# Altium PCB BU04_Kit_PCB.PcbDoc
Units mil, origin at the board's own origin, x right, y up, seen from the top; angles counter-clockwise.
Board outline 2250 x 2505 mil, 2 copper layers (Top Layer, Bottom Layer); 23 components, 40 nets, 137 pads, 56 vias.
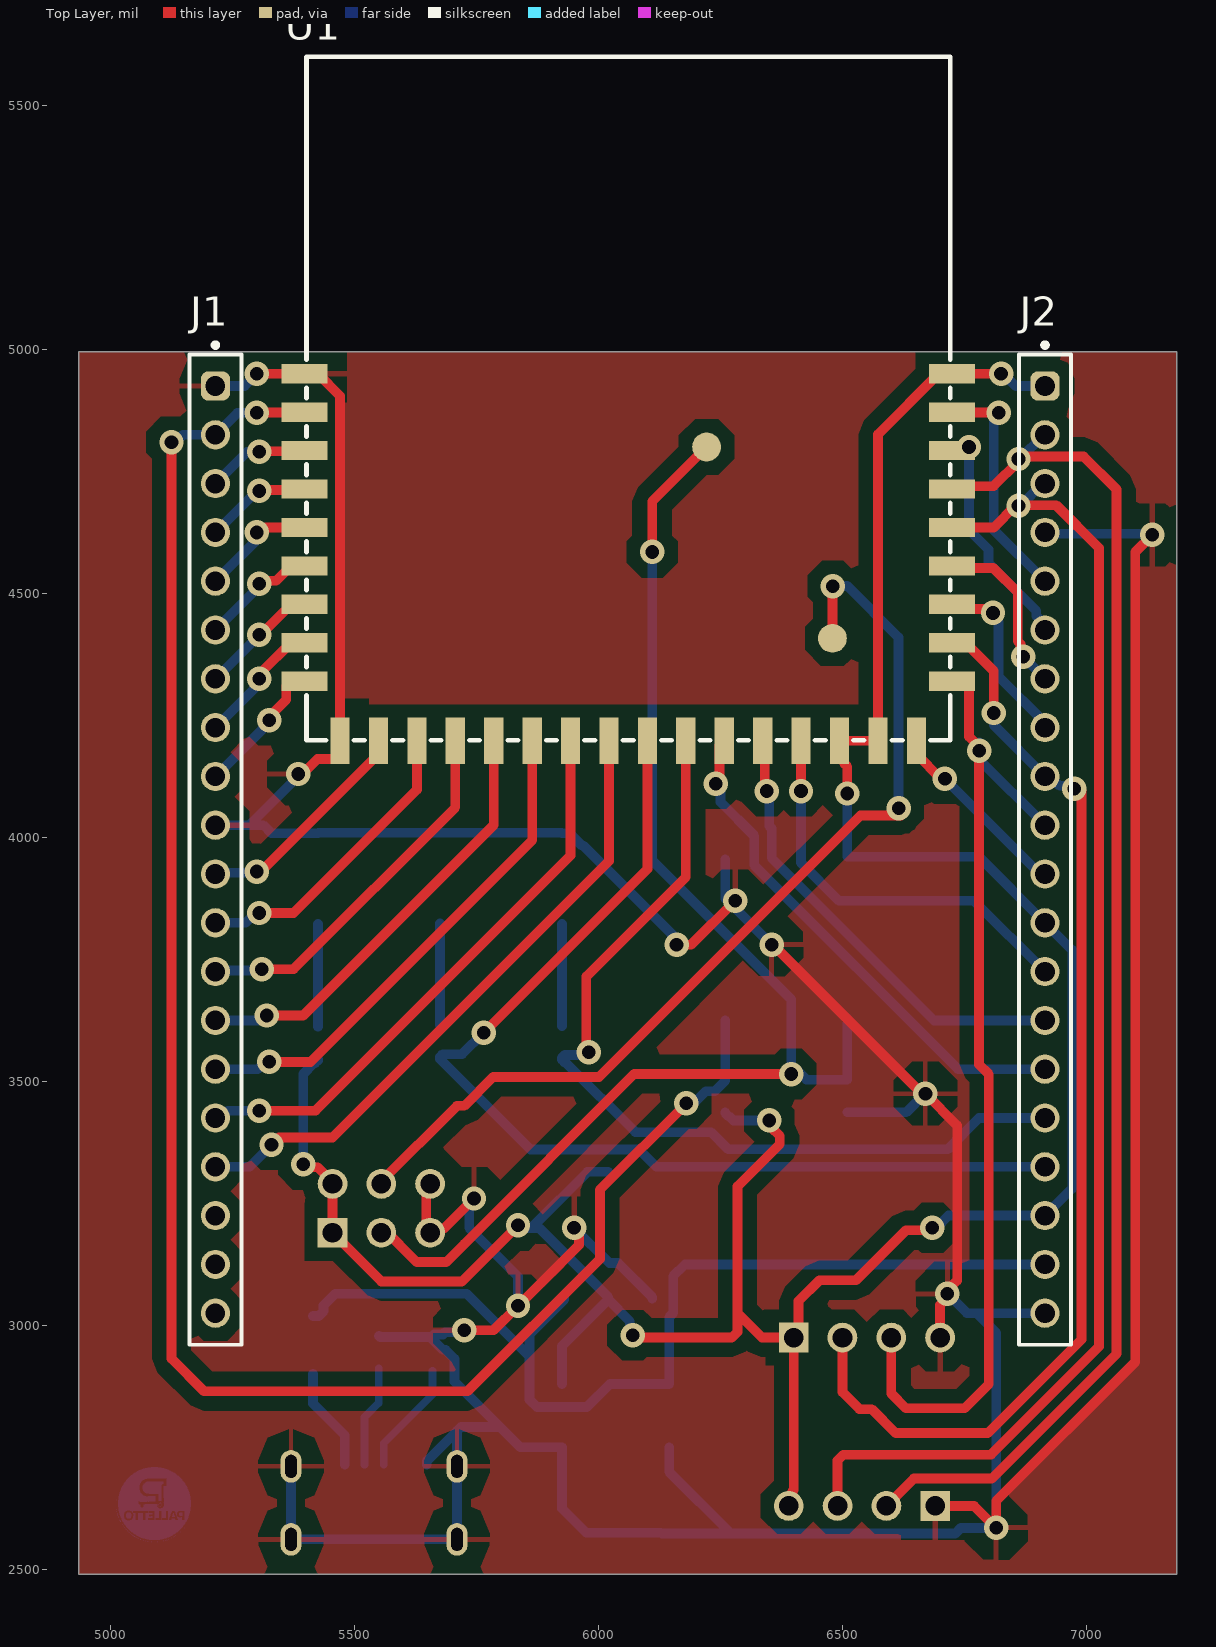
[diagram p0: Top Layer view]
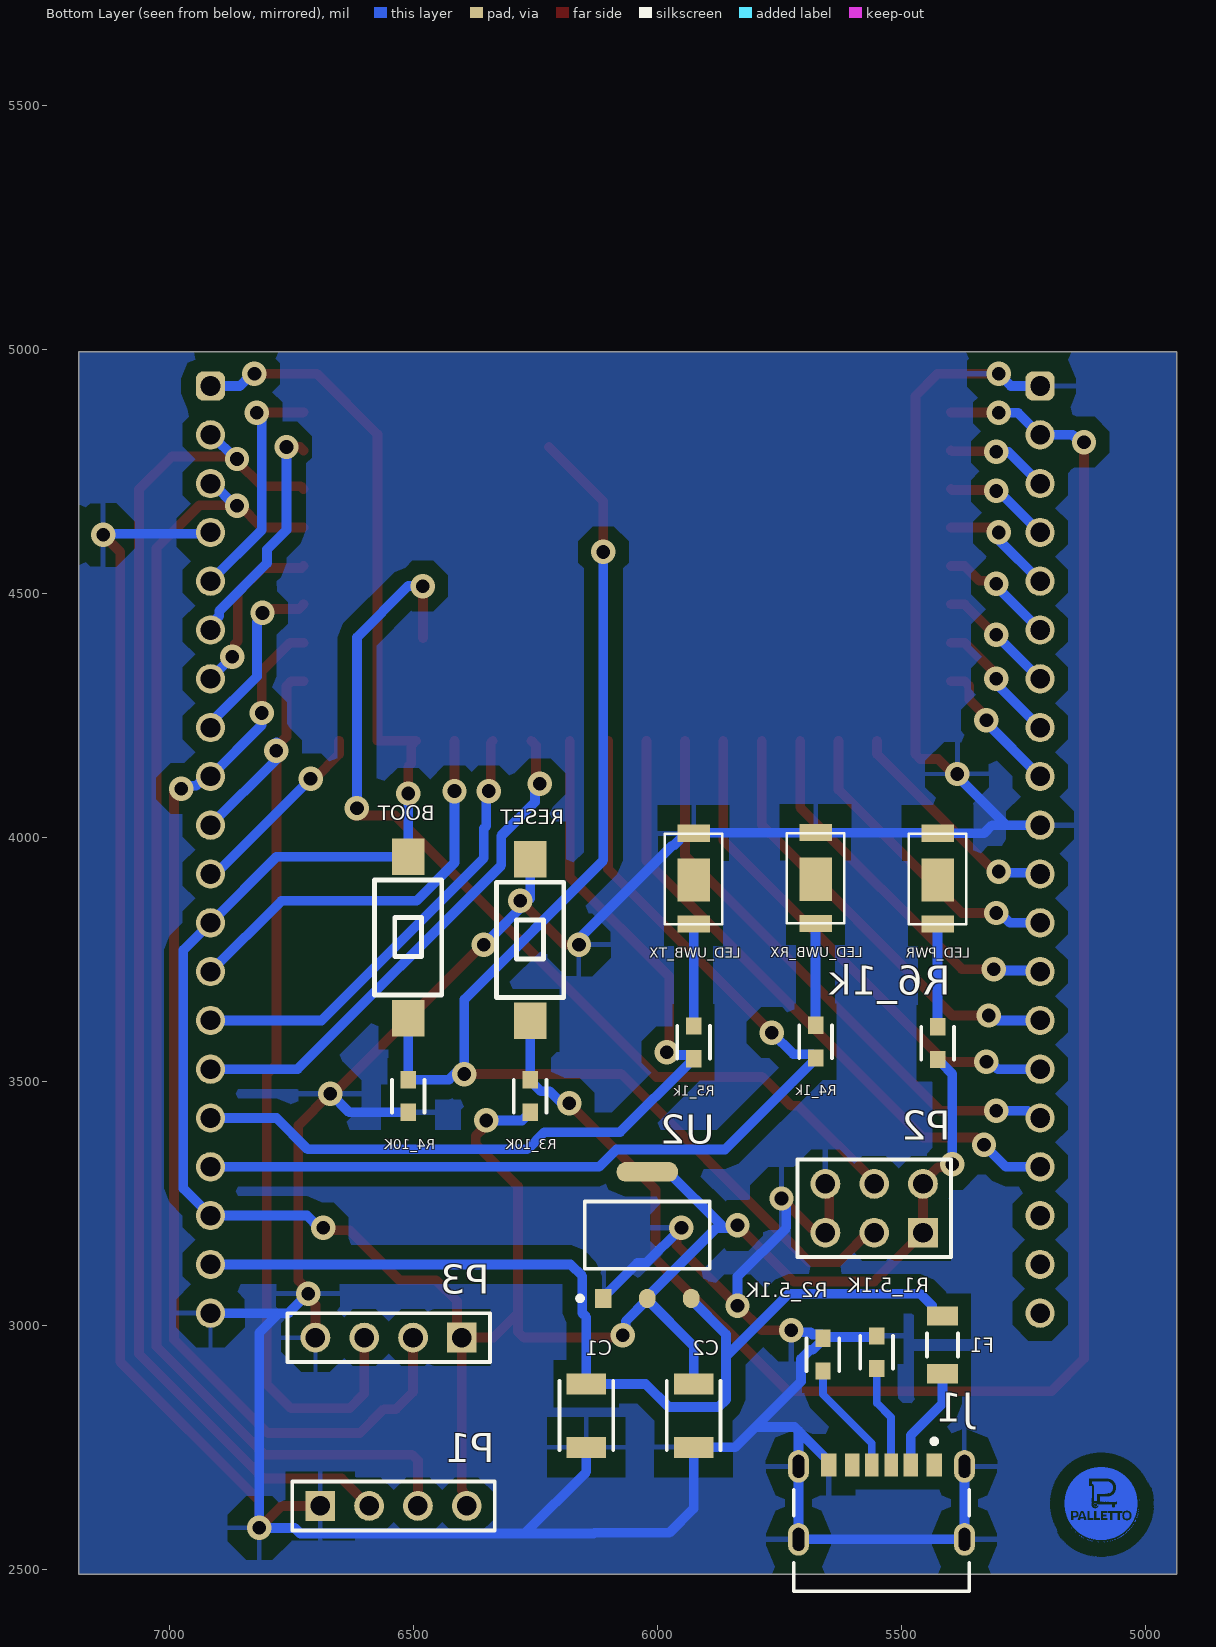
[diagram p1: Bottom Layer view, seen from below]
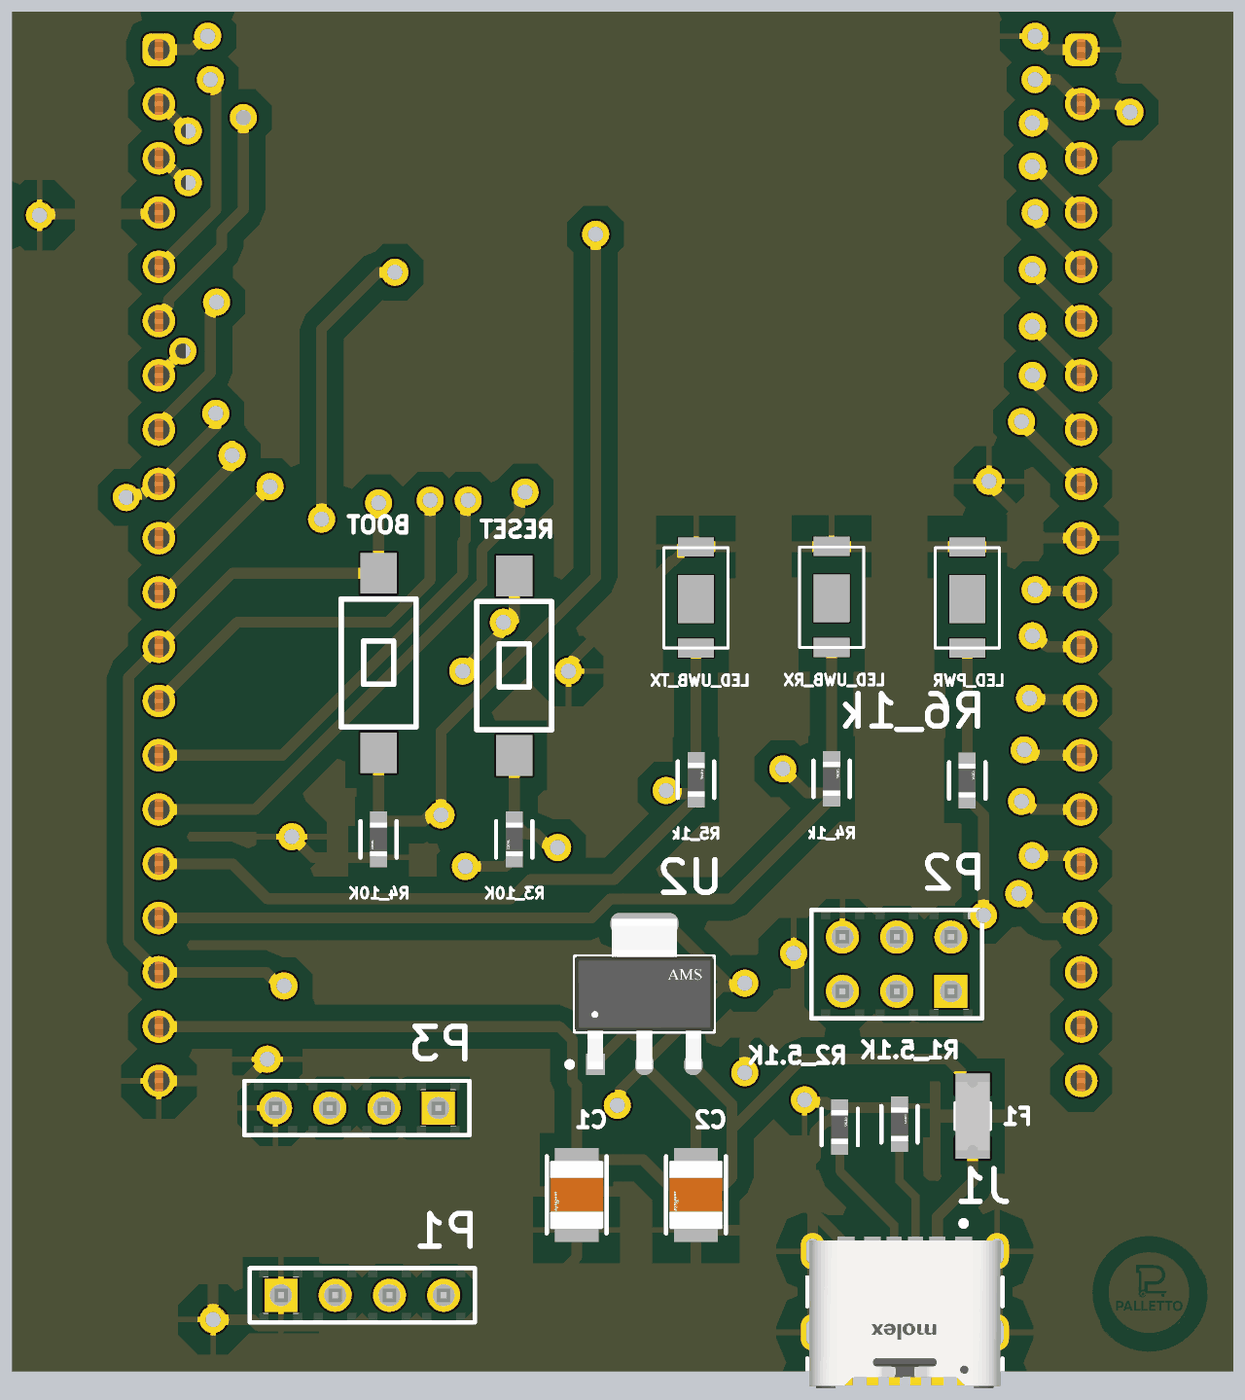
[diagram p2: 3D render of the assembled board from below, using the file's embedded part models]

## Layer stack, top to bottom
Top Solder: solder mask 0.4, Solder Resist, Dk 3.5
Top Layer: signal copper 1.4
Dielectric 1: dielectric 12.6, FR-4, Dk 4.8
Bottom Layer: signal copper 1.4
Bottom Solder: solder mask 0.4, Solder Resist, Dk 3.5

## Board outline
4935,2490 4935,4995 7185,4995 7185,2490

## Design rules (kind name [scope] priority, off if disabled: settings)
Clearance Clearance_Polygon [InPolygon] p1: gap=27.56 ignorepadtopadclearanceinfootprint=TRUE
Clearance Clearance__ [All] p2: gap=15.75 ignorepadtopadclearanceinfootprint=TRUE
MinimumSolderMaskSliver [All] p1: minsoldermaskwidth=0.1
PlaneClearance [All] p1: clearance=100
PlaneConnect [All] p1: planeconnectstyle=Relief reliefexpansion=20 reliefentries=4 reliefconductorwidth=10 reliefairgap=60
PolygonConnect [All] p1: connectstyle=Relief reliefconductorwidth=10 reliefentries=4 polygonreliefangle="90 Angle" airgapwidth=40
RoutingVias [All] p1: holewidth=25 width=60 viastyle="Through Hole" minholewidth=23.62 minwidth=55.12 maxholewidth=50 maxwidth=100
SilkToSilkClearance [All] p1: silktosilkclearance=0.1
SilkToSolderMaskClearance [IsPad] p1: minsilkscreentomaskgap=0 clearancetoexposedcopper=TRUE
SolderMaskExpansion [All] p1: expansion=4 istentingtop=FALSE
UnRoutedNet [All] p1: checkbadconnections=TRUE
Width [All] p1: maxlimit=118.11 minlimit=15.75 preferedwidth=20 minimp=50.000000 maximp=50.000000 favimp=50.000000
24 further rules are at their usual default settings.

## Components (designator, comment, footprint, x,y, rotation, side; value= is the part's Value field where it differs from the comment)
BOOT "SMD TACTILE SWITCH 3X6X2.5MM" SW-SMD_L6.0-W3.5-LS8.0 6510,3795 r90 bottom
C1 "GCJ32ER71E106MA18L" FP-GCJ32E-0_4-0_3-MFG 6145,2815 r270 bottom
C2 "GCJ32ER71E106MA18L" FP-GCJ32E-0_4-0_3-MFG 5925,2815 r270 bottom
F1 "MF-NSMF150-2" BOUR-MF-NSMF150-2_V 5415,2960 r90 bottom
J1 "217175-0001" FP-217175-0001-MFG 5540,2595 r0 bottom
J1 "61302011821" 61302011821 5215,3975 r270 top
J2 "61302011821" 61302011821 6915,3975 r270 top
LED_PWR "5730-LED" 5730-LED 5425,3915 r90 bottom
LED_UWB_RX "5730-LED" 5730-LED 5675,3916.3 r90 bottom
LED_UWB_TX "5730-LED" 5730-LED 5925,3915 r90 bottom
P1 "Debugger" SMTC-MTSW-104-07-X-S-170 6690,2630 r180 bottom
P2 "boot_mode" SMTC-MTSW-103-07-X-D-244 5455,3190 r0 bottom
P3 "UART1" SMTC-MTSW-104-07-X-S-170 6400,2975 r0 bottom
R1_5.1K "AF0603FR-075K1L" FP-AF0603-MFG 5550,2945 r90 bottom
R2_5.1K "AF0603FR-075K1L" FP-AF0603-MFG 5660,2940 r90 bottom
R3_10K "AF0603FR-075K1L" FP-AF0603-MFG 6260,3470 r270 bottom
R4_1k "AF0603FR-075K1L" FP-AF0603-MFG 5675,3581.54 r90 bottom
R4_10K "AF0603FR-075K1L" FP-AF0603-MFG 6510,3470 r270 bottom
R5_1k "AF0603FR-075K1L" FP-AF0603-MFG 5925,3580 r90 bottom
R6_1k "AF0603FR-075K1L" FP-AF0603-MFG 5425,3578.46 r90 bottom
RESET "SMD TACTILE SWITCH 3X6X2.5MM" SW-SMD_L6.0-W3.5-LS8.0 6260,3790 r90 bottom
U1 "BU04" WIRELM-SMD_BU04 6060.95,4574.13 r0 top
U2 "AMS1117-3.3" FP-AMS1117-IPC_C 6020,3185 r90 bottom

## Footprints (in the part's own frame and the unit in brackets; to place one, negate y for a bottom-side part, rotate by r counter-clockwise, add the part's x,y. Pads: shape width x height; smd on the part's side, far side on the other; paste and mask are expansions set on the pad)
5730-LED [mm]
  rect 0.9x1.7 smd paste+0 mask+0.051: A(-2.35,0) C(2.38,0)
  rect 2.25x1.7 smd paste+0 mask+0.051: P$2(-0.055,0)
  silkscreen extent -2.35,-1.5 2.35,1.5
61302011821 [mm] "Socket Header, Pitch 2.54 mm, THT, Vertical, single row, 20p"
  rrect50% 1.52x1.52 hole 1.02: 1(-24.13,0)
  round 1.52 hole 1.02: 2(-21.59,0) 3(-19.05,0) 4(-16.51,0) 5(-13.97,0) 6(-11.43,0) 7(-8.89,0) 8(-6.35,0) 9(-3.81,0) 10(-1.27,0) 11(1.27,0) 12(3.81,0) 13(6.35,0) 14(8.89,0) 15(11.43,0) 16(13.97,0) 17(16.51,0) 18(19.05,0) 19(21.59,0) 20(24.13,0)
  silkscreen extent -26.38,-1.35 25.78,1.35, body extent -25.65,-1.25 25.65,1.25, height 8.55
BOUR-MF-NSMF150-2_V [mm] "SMD, 2-Leads, Body 3.2x1.6mm"
  rect 1x1.6 smd: 1(-1.5,0) 2(1.5,0)
  silkscreen extent -0.6,-0.8 0.6,0.8, body extent -1.6,-0.8 1.6,0.8, height 0.55
FP-217175-0001-MFG [mm]
  rrect100% 1.1x1.7 hole 1.2 slot 0.6 at 0 deg paste-2539.97 mask+0: 1(-4.32,-2.95) 2(4.32,-2.95) 3(-4.32,0.85) 4(4.32,0.85)
  rect 0.7x1.2 smd paste+0 mask+0: A5(-0.5,-3.03) B5(0.5,-3.03)
  rect 0.76x1.2 smd paste+0 mask+0: A9(1.52,-3.03) B9(-1.52,-3.03)
  rect 0.8x1.2 smd paste+0 mask+0: A12(2.75,-3.03) B12(-2.75,-3.03)
  silkscreen extent -4.57,-4.37 4.57,3.55, body extent -4.47,-3.45 4.47,3.45, height 3.46
FP-AF0603-MFG [mm]
  rect 0.9x0.8 smd paste+0 mask+0: 1(-0.85,0) 2(0.85,0)
  silkscreen extent -0.85,-0.85 0.85,0.85, body extent -0.8,-0.4 0.8,0.4, height 0.55
FP-AMS1117-IPC_C [mm]
  rect 1.004x0.872 smd paste+0 mask+0: 1(-3.295,2.29)
  rrect100% 1.004x0.872 smd paste+0 mask+0: 2(-3.295,0) 3(-3.295,-2.29)
  rrect87% 1.004x3.182 smd paste+0 mask+0: 4(3.295,0)
  silkscreen extent -3.42,-3.25 1.75,3.63, body extent -3.53,-3.25 3.53,3.25, height 1.8
FP-GCJ32E-0_4-0_3-MFG [mm]
  rect 1.1x2.05 smd paste+0 mask+0: 1(-1.65,0) 2(1.65,0)
  silkscreen extent -1.8,-1.4 1.8,1.4, body extent -1.6,-1.25 1.6,1.25, height 2.8
SMTC-MTSW-103-07-X-D-244 [mm] "Assembly .025\" [.64] SQ Post Terminal Strip, 2x3 Pins, Vertical, 2.54mm Pitch, Male"
  rect 1.55x1.55 hole 1.02: 1(0,0)
  round 1.55 hole 1.02: 2(0,-2.54) 3(2.54,0) 4(2.54,-2.54) 5(5.08,0) 6(5.08,-2.54)
  silkscreen extent -1.46,-3.81 6.54,1.27, body extent -1.27,-3.81 6.35,1.27, height 2.18
SMTC-MTSW-104-07-X-S-170 [mm] "Assembly .025\" [.64] SQ Post Terminal Strip, 1x4 Pins, Vertical, 2.54mm Pitch, Male"
  rect 1.55x1.55 hole 1.02: 1(0,0)
  round 1.55 hole 1.02: 2(2.54,0) 3(5.08,0) 4(7.62,0)
  silkscreen extent -1.46,-1.27 9.08,1.27, body extent -1.27,-1.27 8.89,1.27, height 4.06
SW-SMD_L6.0-W3.5-LS8.0 [mm]
  rect 1.9x1.7 smd paste+0 mask+0.102: 1(-4.2,0) 2(4.2,0)
  silkscreen extent -3,-1.75 3,1.75
WIRELM-SMD_BU04 [mm]
  rect 2.4x1 smd paste+0 mask+0.051: 1(-16.85,9.55) 2(-16.85,7.55) 3(-16.85,5.55) 4(-16.85,3.55) 5(-16.85,1.55) 6(-16.85,-0.45) 7(-16.85,-2.45) 8(-16.85,-4.45) 9(-16.85,-6.45) 26(16.85,-6.45) 27(16.85,-4.45) 28(16.85,-2.45) 29(16.85,-0.45) 30(16.85,1.55) 31(16.85,3.55) 32(16.85,5.55) 33(16.85,7.55) 34(16.85,9.55)
  rect 1x2.4 smd paste+0 mask+0.051: 10(-15,-9.55) 11(-13,-9.55) 12(-11,-9.55) 13(-9,-9.55) 14(-7,-9.55) 15(-5,-9.55) 16(-3,-9.55) 17(-1,-9.55) 18(1,-9.55) 19(3,-9.55) 20(5,-9.55) 21(7,-9.55) 22(9,-9.55) 23(11,-9.55) 24(13,-9.55) 25(15,-9.55)
  round 1.5 smd paste+0 mask+0.051: 35(4.08,5.74) 36(10.63,-4.22)
  silkscreen extent -16.75,-9.52 16.76,26.05

## Part data
BOOT RESET: Manufacturer=USAKRO, Manufacturer Part=UK-B0240-R-250, Contributor=LCSC, spicePre=S, spiceSymbolName="SMD TACTILE SWITCH 3X6X2.5MM", Supplier=LCSC, Supplier Part=C556660
C1 C2: library part CMP-06035-029490-1, "Capacitor 10uF ±20%, X7R, 25VDC, SMD 1210 (3225 metric)"
F1: library part CMP-2000-06693-1, "PTC Resettable Fuse, 6 V, 100 A, -40 to 85 degC, 2-Pin SMD, RoHS, Tape and Reel", Current Rating=100A, Hold Current=1.5A, Manufacturer=Bourns, Maximum Voltage=6VDC, Maximum Voltage DC=6V, Operating Temperature Range=-40Cto+85C, Package / Case=1206(3216metric), Package Description="2-Pin Surface Mount Device, Body 3.2 x 1.6 mm", Resistance=130mOhms, Trip Current=3A, Brand=Bourns, Current Rating (Max)=100A, Current Rating - Max=100A, Datasheet URL=http://www.bourns.com/docs/Product-Datasheets/mfnsmf.pdf, Datasheet Version="Rev. T, 08/2015", Dimensions=3.4mmLx1.8mmWx0.7mmH, Factory Pack Quantity=3000, Manufacturer URL=http://www.bourns.com/, Mounting Style=SMD/SMT, Mounting Technology=SurfaceMount, Package Reference=MF-NSMF150-2, Packaging=Reel, Product Category=ResettableFuses-PPTC, RoHS=Details, Series=MF-NSMF, Termination Style=SMD/SMT, Tradename=Multifuse, Type=PTCResettableFuses
J1: library part CMP-04767-000026-1, "CONN RCP USB2.0 C 6+18P SMD RA"
J1 J2: library part CMP-1502-01348-4, "THT Vertical Socket Header WR-PHD, Pitch 2.54 mm, Single Row, 20 pins", Contact Resistance=20mΩ, Current Rating=3A, Operating Supply Voltage=250V, Gender=Female, Lead Pitch=2.54mm, Number of Pins=20, Orientation=Vertical
P1 P3: library part CMP-1024-00104-1, "Modified .025\" SQ Post Header, Through-hole, Vertical, -55 to 125 degC, 2.54 mm Pitch, 4-Pin, Male, RoHS", Manufacturer=Samtec, PartNumber=MTSW-104-07-G-S-170, Temperature Range="-55 to 125 degC", ComponentLink1Description="Manufacturer URL", ComponentLink1URL=http://www.samtec.com, ComponentLink2Description=Datasheet, ComponentLink2URL=http://www.samtec.com/documents/webfiles/pdf/MTSW.PDF, ComponentLink3Description="Package Specification", ComponentLink3URL=http://www.samtec.com/documents/webfiles/cpdf/MTSW-XXX-XX-X-X-XXXX-XX-XXX-MKT1.pdf, DatasheetVersion=F-214, Mounting Technology=Through-hole, Orientation=Vertical, PackageDescription="Assembly .025\" [.64] SQ Post Terminal Strip", PackageReference=MTSW-104-07-X-S-170, PackageVersion="BI, 2/1987", Pitch="2.54 mm", RoHS=True
P2: library part CMP-1024-00096-1, "Modified .025\" SQ Post Header, Through-hole, Vertical, -55 to 125 degC, 2.54 mm Pitch, 6-Pin, Male, RoHS", Manufacturer=Samtec, PartNumber=MTSW-103-07-G-D-244, Temperature Range="-55 to 125 degC", ComponentLink1Description="Manufacturer URL", ComponentLink1URL=http://www.samtec.com, ComponentLink2Description=Datasheet, ComponentLink2URL=http://www.samtec.com/documents/webfiles/pdf/MTSW.PDF, ComponentLink3Description="Package Specification", ComponentLink3URL=http://www.samtec.com/documents/webfiles/cpdf/MTSW-XXX-XX-X-X-XXXX-XX-XXX-MKT1.pdf, DatasheetVersion=F-214, Mounting Technology=Through-hole, Orientation=Vertical, PackageDescription="Assembly .025\" [.64] SQ Post Terminal Strip", PackageReference=MTSW-103-07-X-D-244, PackageVersion="BI, 2/1987", Pitch="2.54 mm", RoHS=True
R1_5.1K R2_5.1K: library part CMP-03412-041991-1, "Anti-Sulfurated Chip Resistors Automotive Grade 5.1kΩ 1% 100ppm/°C 0603", Case/Package=0603, Max Operating Temperature=155°C, Max Power Dissipation=100mW, Min Operating Temperature=-55°C, Resistance=5.1kR, Resistor Type="Thick Film", Temperature Coefficient=100ppm/°C, Tolerance=1%, Features="Moisture Resistant", Height=0.022inch, Length=0.063inch, Number of Terminations=2, Packaging="Tape and Reel", RoHS Compliant=Yes, Series=AF, Width=0.031inch
R3_10K R4_10K: library part CMP-03412-041991-1, "Anti-Sulfurated Chip Resistors Automotive Grade 5.1kΩ 1% 100ppm/°C 0603", Case/Package=0603, Max Operating Temperature=155°C, Max Power Dissipation=100mW, Min Operating Temperature=-55°C, Resistance=10kR, Resistor Type="Thick Film", Temperature Coefficient=100ppm/°C, Tolerance=1%, Features="Moisture Resistant", Height=0.022inch, Length=0.063inch, Number of Terminations=2, Packaging="Tape and Reel", RoHS Compliant=Yes, Series=AF, Width=0.031inch
R4_1k R5_1k R6_1k: library part CMP-03412-041991-1, "Anti-Sulfurated Chip Resistors Automotive Grade 5.1kΩ 1% 100ppm/°C 0603", Case/Package=0603, Max Operating Temperature=155°C, Max Power Dissipation=100mW, Min Operating Temperature=-55°C, Resistance=1kR, Resistor Type="Thick Film", Temperature Coefficient=100ppm/°C, Tolerance=1%, Features="Moisture Resistant", Height=0.022inch, Length=0.063inch, Number of Terminations=2, Packaging="Tape and Reel", RoHS Compliant=Yes, Series=AF, Width=0.031inch
U1: JLCPCB Part Class="Extended Part", Manufacturer=Ai-Thinker(安信可), Contributor=lcsc, Manufacturer Part=BU04, spicePre=U, spiceSymbolName=BU04, Supplier=LCSC, Supplier Part=C42420050
U2: library part CMP-209535-000001-1, "LDO Voltage Regulators 1A, 3.3V", Dropout Voltage=1.1V, Manufacturer="Advanced Monolithic Systems", Max Junction Temp=+125°C, Max Power Dissipation=1.2W, Max Supply Voltage=15V, Nominal Supply Current=5mA, Output Current=1A, Output Voltage=3.3V, Package=AMS1117, Temperature="-40°C to +125°C", Temperature Range Low=-40°C, Automotive=No, Category=IC, ComponentLink2Description=Datasheet, ComponentLink2URL=http://www.advanced-monolithic.com/pdf/ds1117.pdf, Device Class L1="Integrated Circuits (ICs)", Device Class L2="Power Management ICs", Device Class L3="Voltage Regulators - Linear", Height=1.8mm, Ipc Land Pattern Name=SOT229P700X180-4, Lead Free=Yes, Manufacturer Part Number=AMS1117-3.3, Number Of Outputs=1, Octopart=https://octopart.com/ams1117-3.3-advanced+monolithic+systems-25899300, Output Type=Fixed, RoHS=TRUE, Standoff Height=0.64mm, Temperature Range High=+125°C
LED_PWR LED_UWB_RX LED_UWB_TX: Contributor=wystewart, spicePre=?, spiceSymbolName=5730-LED

## Via types
v1: diameter 50, hole 28, Top Layer to Bottom Layer, 56 vias

## Nets (pads, with @x,y where several pads share a name; then routed paths per layer and width w, separated by ;. In a path a pad name is that pad's centre, name@x,y a point inside that pad or via, vN(x,y) a via of type N, cw(c..) or ccw(c..) an arc to the next point about the centre after c; other vN are vias at no path point)
NetBOOT_1: BOOT.1 P2.3 R4_10K.1 U1.35 | length 2712
  Top Layer w20: P2.3@5560,3197.5 5627.5,3130 5688.28,3130 5725,3166.72 5725,3166.77 6073.23,3515 v1(6395,3515) ; v1(6110,4585) 6110,4688.54 U1.35
  Bottom Layer w20: v1(6110,4585) 6110,3953.23 6395,3668.23 v1(6395,3515) ; v1@6405,3525 6426.54,3503.46 R4_10K.1 BOOT.1
NetBOOT_2: BOOT.2 C2.1 J2.1 J2.12 J2.18 P1.4 P2.1 P2.2 P3.1 R3_10K.2 R6_1k.1 U1.23 U1.24 U1.34 U2.2 U2.4 | length 6011.1
  Top Layer w20: v1(5395,3330) 5400.74,3324.26 5424.64,3324.26 5448.08,3300.81 5443.9,3301.1 P2.2 5455,3200 P2.1 5555,3090 5680.12,3090 5720,3090 v1(5835,3205) ; v1(6070,2980) 6075,2975 6273.28,2975 6285,2986.72 6285,3025 ; v1@6355,3405 6371.72,3388.28 6371.72,3371.72 6285,3285 6285,3025 ; P1.4 6397.85,2637.85 6397.85,2660.08 6400,2662.23 P3.1 ; v1(6510,4090) 6510,4145 6503.7,4151.3 6503.7,4188.47 U1.23 U1.24 6572.76,4826.1 6696.77,4950.12 U1.34 6724.39,4950.06 6824.94,4950.06 v1(6825,4950) ; v1(6684.25,3200) 6679.25,3195 6630,3195 6527.5,3092.5 6452.5,3092.5 6410,3050 6410,2985 P3.1 ; 6285,3025 6335,2975 P3.1
  Bottom Layer w20: v1(5395,3330) 5395,3515 5417.28,3537.28 5419.25,3537.28 5425,3543.03 R6_1k.1 ; v1@5840.74,3199.26 5878.62,3199.26 6020,3057.88 U2.2 U2.2@6020,3052.67 ; 5867.4,3205 5977.13,3314.72 U2.4 ; C2.1 5925,2957.67 U2.2@6020,3052.67 ; v1(6070,2980) 6064.26,2985.74 6064.26,3008.41 U2.2@6020,3052.67 ; R3_10K.2 6260,3434.57 6265.75,3428.82 6267.72,3428.82 6276.54,3420 v1(6350,3420) ; P3.1@6390,2965 P3.1 ; v1@6510,4085 BOOT.2 6779.65,3960.35 J2.12 6970.67,3769.33 6970.67,3280.67 J2.18 6717.37,3225 6692.37,3200 v1(6684.25,3200) ; v1@6835,4945 6855,4925 J2.1
NetC1_1: C1.1 F1.2 J2.19 U2.3 | length 2068.4
  Bottom Layer w20: F1.2 5426.81,3019.06 5436.49,3028.74 5436.49,3040.55 5460.94,3065 5730,3065 5858.9,2936.1 ; U2.3 5929.84,3052.67 5858.9,2981.73 5858.9,2936.1 ; J2.19 6177.28,3125 6153.07,3100.79 6153.07,3024.84 6145,3016.77 C1.1 6023.42,2879.96 5976.02,2832.56 5873.98,2832.56 5858.9,2847.64 5858.9,2936.1
NetC1_2: C1.2 C2.2 J1.1 J1.2@5710.08,2711.14 J1.3@5369.92,2561.54 J1.4@5710.08,2561.54 J1.10 J1.A12 J2.4 J2.20 LED_PWR.C LED_UWB_RX.C LED_UWB_TX.C P1.1 P2.5 P2.6 P3.4 R1_5.1K.2 R2_5.1K.2 R4_10K.2 RESET.2 U1.1 U1.10 U2.1 | length 10833.3
  Top Layer w20: v1(5300,4950) 5300.06,4950.06 5397.5,4950.06 U1.1 5425.12,4950.12 5470.55,4904.69 5470.55,4198.31 U1.10 5470.4,4170.59 5460.71,4160.91 5424.02,4160.91 5393.12,4130 v1(5385,4130) ; P2.6 5647.15,3282.15 5647.15,3197.85 P2.5 5662.85,3197.85 5682.85,3197.85 v1(5745,3260) ; v1(5725,2990) 5785,2990 v1(5835,3040) 5960,3165 v1@5960,3190 ; v1(6160,3780) 6190,3780 v1(6280,3870) ; v1(6355,3780) 6357.5,3780 6662.5,3475 v1(6670,3475) 6735,3410 6735,3091.72 v1@6721.44,3078.16 ; P1.1 6770,2630 v1(6815,2585) 6815,2640 7100,2925 7100,4585 v1(7135,4620) ; P3.4 6700,3041.88 6715,3056.88 v1(6715,3065)
  Bottom Layer w20: J1.10 5285,4025 ; J1.1@5215,4925 5275,4925 v1(5300,4950) ; J1.1@5369.92,2711.14 5369.92,2561.54 5710.08,2561.54 5710.08,2711.14 5710.08,2783.98 ; v1@5387.5,4127.5 5285,4025 ; R1_5.1K.2 5552.5,2975.96 R2_5.1K.2@5657.5,2975.96 ; J1.A12 5648.27,2722.17 5710.08,2783.98 ; v1(5725,2990) 5720.75,2985.75 5685.75,2985.75 5681.18,2981.18 5662.72,2981.18 R2_5.1K.2@5657.5,2975.96 ; v1(5745,3260) 5735,3250 5735,3200 5835,3100 v1(5835,3040) ; v1(5950,3200) 6022.38,3127.62 6040.41,3127.62 6110.16,3057.88 U2.1 ; C1.2 6145,2700 6271.26,2573.74 ; v1@6154.26,3797.74 5969.13,3982.87 5966.58,3982.87 5940.75,4008.7 LED_UWB_TX.C 5924.35,4009.35 5675.65,4009.35 LED_UWB_RX.C 5674.35,4009.35 5425.65,4009.35 LED_PWR.C 5329.48,4008.7 5313.18,4025 5285,4025 ; RESET.2 6260,3875 v1(6355,3780) ; R4_10K.2 6630.68,3436.54 6669.15,3475 v1(6670,3475) ; P1.1@6671.09,2611.09 P1.1 ; v1(6715,3065) 6755,3025 6775,3025 ; J2.20 6775,3025 ; J2.4 6917.5,4622.5 7132.5,4622.5 v1(7135,4620) ; R2_5.1K.2@5657.5,2975.96 R2_5.1K.2 5660,2971.5 5681.5,2950 5686.41,2950 5705,2931.41 5705,2885 5798.05,2791.95 ; 5710.08,2783.98 5718.05,2791.95 5798.05,2791.95 ; 5798.05,2791.95 5839.96,2750.04 C2.2 5925,2625 5975,2575 6128.74,2575 6130,2573.74 6271.26,2573.74 ; 6271.26,2573.74 6731.18,2573.74 6742.44,2585 v1(6815,2585) 6815,2985 6775,3025
NetF1_1: F1.1 J1.B9 | length 213.6
  Bottom Layer w20: F1.1 5415,2839.68 5480.16,2774.53 J1.B9
NetJ1_2: J1.2@5215,4825 R3_10K.1 RESET.1 U1.2 | length 3796.7
  Top Layer w20: v1(5125,4810) 5125,2931.72 5191.72,2865 5731.77,2865 6003.01,3136.25 6003.01,3278.01 v1(6180,3455) ; v1(5300,4870) 5300.69,4870.69 5396.87,4870.69 U1.2
  Bottom Layer w20: v1(5125,4810) 5133.12,4810 5148.12,4825 5215,4825 5260,4870 v1(5300,4870) v1@5310,4870 ; v1@6200,3460 6220,3480 6238.5,3480 6260,3501.5 R3_10K.1 RESET.1
NetJ1_3: J1.3@5215,4725 U1.3 | length 200.6
  Top Layer w20: v1(5305,4790) 5306.32,4791.32 5396.24,4791.32 U1.3
  Bottom Layer w20: J1.3@5215,4725 5280,4790 v1@5295,4790
NetJ1_4: J1.4@5215,4625 U1.4 | length 212.3
  Top Layer w20: v1(5305,4710) 5306.95,4711.95 5395.61,4711.95 U1.4
  Bottom Layer w20: J1.4@5215,4625 5295,4705 v1@5300,4705
NetJ1_5: J1.5 U1.5 | length 237
  Top Layer w20: v1(5300,4625) 5308.12,4625 5318.28,4635.16 U1.5
  Bottom Layer w20: J1.5 5300,4610 v1(5300,4625)
NetJ1_6: J1.6 U1.6 | length 239.9
  Top Layer w20: v1(5305,4520) 5310.74,4525.74 5339.32,4525.74 5370,4556.42 U1.6
  Bottom Layer w20: J1.6 5305,4515 v1(5305,4520)
NetJ1_7: J1.7 U1.7 | length 245.8
  Top Layer w20: v1(5305,4415) 5307.32,4415 5370,4477.68 U1.7
  Bottom Layer w20: J1.7 v1(5305,4415)
NetJ1_8: J1.8 U1.8 | length 275.7
  Top Layer w20: v1(5305,4325) 5310.74,4330.74 5310.74,4339.68 5370,4398.94 U1.8
  Bottom Layer w20: J1.8 5305,4315 v1(5305,4325) v1@5305,4335
NetJ1_9: J1.9 U1.9 | length 292
  Top Layer w20: v1(5325,4240) 5325,4247.15 5360.32,4282.47 5360.32,4310.51 5370,4320.2 U1.9
  Bottom Layer w20: J1.9 5325,4235 v1(5325,4240) v1@5325,4245
NetJ1_11: J1.11 U1.11 | length 463.4
  Top Layer w20: v1(5300,3930) 5308.54,3930 5549.14,4170.59 U1.11
  Bottom Layer w20: J1.11 5217.5,3927.5 5297.5,3927.5 v1(5300,3930)
NetJ1_12: J1.12 U1.12 | length 626.2
  Top Layer w20: v1(5305,3845) 5375,3845 5627.88,4097.88 U1.12
  Bottom Layer w20: J1.12 5276.88,3825 5296.88,3845 v1(5305,3845)
NetJ1_13: J1.13 U1.13 | length 767.6
  Top Layer w20: v1(5310,3730) 5375,3730 5706.62,4061.62 U1.13
  Bottom Layer w20: J1.13 5217.5,3727.5 5307.5,3727.5 v1(5310,3730)
NetJ1_14: J1.14 U1.14 | length 909
  Top Layer w20: v1(5320,3635) 5395,3635 5785.36,4025.36 U1.14
  Bottom Layer w20: J1.14 5301.88,3625 5311.88,3635 v1(5320,3635)
NetJ1_15: J1.15 U1.15 | length 1047.5
  Top Layer w20: v1(5325,3540) 5410,3540 5864.1,3994.1 U1.15
  Bottom Layer w20: J1.15 5301.88,3525 5316.88,3540 v1(5325,3540)
NetJ1_16: J1.16 U1.16 | length 1185.9
  Top Layer w20: v1(5305,3440) 5420,3440 5942.84,3962.84 U1.16
  Bottom Layer w20: J1.16 5225.78,3425 5240.78,3440 v1(5305,3440)
NetJ1_17: J1.17 U1.17 | length 1312.7
  Top Layer w20: v1(5330,3370) 5345,3385 5455,3385 6021.58,3951.58 U1.17
  Bottom Layer w20: J1.17 5285,3325 v1(5330,3370)
NetJ1_A5: J1.A5 R1_5.1K.1 | length 209.5
  Bottom Layer w15.75: J1.A5@5520.51,2714.29 5520.51,2811.63 5550,2841.12 R1_5.1K.1
NetJ1_B5: J1.B5 R2_5.1K.1 | length 233.8
  Bottom Layer w15.75: J1.B5 5559.69,2758.53 5660,2858.84 R2_5.1K.1
NetJ2_2: J2.2 P1.2 U1.31 | length 2840.4
  Top Layer w20: P1.2 6646.26,2686.26 6806.07,2686.26 7061.5,2941.69 7061.5,4713.5 6994.33,4780.67 v1@6860.75,4780.67 ; U1.31 6730.13,4719.69 6809.69,4719.69 6860.75,4770.75 v1(6860.75,4775.37)
  Bottom Layer w20: v1(6860.75,4775.37) 6863.06,4775.37 6912.69,4825 J2.2
NetJ2_3: J2.3 P1.3 U1.30 | length 2791.6
  Top Layer w20: P1.3 6490,2723.28 6501.72,2735 6804.25,2735 7025.75,2956.5 7025.75,4592.98 6938.06,4680.67 6861.42,4680.67 v1(6860.75,4680) 6855,4680 6810.16,4635.16 U1.30
  Bottom Layer w20: v1(6860.75,4680) 6865.37,4680 6910.37,4725 J2.3
NetJ2_5: J2.5 U1.33 | length 474.7
  Top Layer w20: U1.33 6725.02,4870.69 6819.31,4870.69 v1(6820,4870)
  Bottom Layer w20: v1@6810,4860 6810,4630 J2.5
NetJ2_6: J2.6 U1.32 | length 477.5
  Top Layer w20: U1.32 6731.69,4800 v1(6759.25,4800)
  Bottom Layer w20: v1(6759.25,4800) 6759.25,4630.19 6799.25,4590.19 6799.25,4562.02 6897.18,4464.1 6897.18,4453.6 6915,4435.78 J2.6
NetJ2_7: J2.7 U1.29 | length 357.6
  Top Layer w20: U1.29 6728.49,4552.25 6809.02,4552.25 6859.33,4501.94 6859.33,4401.94 6865.01,4396.26 6865.01,4375.64 v1(6870.75,4369.9)
  Bottom Layer w20: v1(6870.75,4369.9) 6870.75,4369.58 6915,4325.32 J2.7
NetJ2_8: J2.8 U1.28 | length 370.7
  Top Layer w20: U1.28 6734.02,4467.99 6792.47,4467.99 6800.46,4460 v1(6808.58,4460)
  Bottom Layer w20: v1(6808.58,4460) 6808.58,4453.31 6820,4441.89 6820,4330 6915,4235 J2.8
NetJ2_9: J2.9 P3.2 U1.27 | length 2279.2
  Top Layer w20: P3.2 6500,2863.23 6535,2828.23 6560,2828.23 6608.98,2779.25 6797.95,2779.25 6990,2971.3 v1@6990,4095 ; U1.27 6751.89,4398.94 6810,4340.83 v1(6810,4255)
  Bottom Layer w20: v1(6810,4255) 6810,4230 J2.9 6925.78,4125 6945.04,4105.74 6969.26,4105.74 v1(6975,4100)
NetJ2_10: J2.10 P3.3 U1.26 | length 2060.4
  Top Layer w20: P3.3 6600,2860 6630,2830 6750,2830 6800,2880 6800,3514.69 6780,3534.69 v1(6780,4177.5) 6780,4185.62 6759.25,4206.37 6759.25,4310.51 6749.57,4320.2 U1.26
  Bottom Layer w20: v1@6780,4195 v1(6780,4177.5) 6780,4160 J2.10
NetJ2_11: J2.11 U1.25 | length 399.9
  Top Layer w20: U1.25 6651.5,4170.59 6702.09,4120 v1(6710,4120)
  Bottom Layer w20: v1@6705,4125 v1(6710,4120) 6905,3925 J2.11
NetJ2_13: J2.13 U1.22 | length 839.7
  Top Layer w20: v1(6415,4095) 6415.14,4095.14 6415.14,4198.01 U1.22
  Bottom Layer w20: v1@6410,4090 6415,4085 6415,3948.07 6493.07,3870 6770,3870 J2.13
NetJ2_14: J2.14 U1.21 | length 938.9
  Top Layer w20: U1.21 6340.77,4193.92 6340.77,4099.23 v1(6345,4095)
  Bottom Layer w20: v1@6350,4090 6350,4023.18 6354.96,4018.22 6354.96,3957.56 6687.52,3625 J2.14
NetJ2_15: J2.15 U1.20 | length 1060.3
  Top Layer w20: v1(6240,4110) 6240,4118.12 6248.11,4126.23 6248.11,4188.47 U1.20
  Bottom Layer w20: v1@6250,4110 6250,4072.63 6319.21,4003.42 6319.21,3942.75 6736.96,3525 J2.15
NetJ2_16: J2.16 R5_1k.1 U1.19 | length 1874.1
  Top Layer w20: v1@5975,3565 5975,3715 6179.06,3919.06 U1.19
  Bottom Layer w20: v1(5980,3560) 5971.88,3560 5966.13,3554.25 5930.75,3554.25 5925,3548.5 R5_1k.1 5925,3544.57 5930.75,3538.82 5932.72,3538.82 6075.55,3395.99 6230.67,3395.99 6265.91,3360.75 6715.75,3360.75 6780,3425 J2.16
NetJ2_17: J2.17 R4_1k.1 U1.18 | length 2183.3
  Top Layer w20: v1(5765,3600) 6100.32,3935.32 U1.18
  Bottom Layer w20: v1(5765,3600) 5720.79,3555.79 5680.75,3555.79 5675,3550.04 R4_1k.1 5675,3546.1 5860.86,3360.24 6083.23,3360.24 6118.47,3325 J2.17
NetLED_PWR_A: LED_PWR.A R6_1k.2 | length 210.6
  Bottom Layer w20: R6_1k.2 LED_PWR.A
NetLED_UWB_RX_A: LED_UWB_RX.A R4_1k.2 | length 208.8
  Bottom Layer w20: R4_1k.2 LED_UWB_RX.A
NetLED_UWB_TX_A: LED_UWB_TX.A R5_1k.2 | length 209
  Bottom Layer w20: R5_1k.2 LED_UWB_TX.A
NetP2_4: P2.4 U1.36 | length 2014.9
  Top Layer w20: P2.4@5552.5,3292.5 5710,3450 5725,3450 5784.25,3509.25 6001.02,3509.25 6536.77,4045 v1@6620,4045 ; U1.36 6479.73,4408.27 6479.73,4514.73 v1(6480,4515)
  Bottom Layer w20: v1(6480,4515) 6510,4515 6615,4410 v1(6615,4060)
pads on no net: J1.18 J1.19 J1.20 J1.A9 J1.B12 LED_PWR.P$2 LED_UWB_RX.P$2 LED_UWB_TX.P$2

## Polygon pours and split planes (outlines as drawn)
NetC1_2 on Bottom Layer "NETC1_2_L02_P000" (solid, remove dead copper, pour order 0): 4935,4995 7185,4995 7185,2490 4935,2490
NetC1_2 on Top Layer "NETC1_2_L01_P002" (solid, remove dead copper, pour order 2): 4935,4995 7185,4995 7185,2490 4935,2490

## Other copper
Bottom Layer:
  drawing of 239 lines, arcs and shapes, not listed